# Altium PCB Integrated Preamp PCB.PcbDoc
Units mil, origin at the board's own origin, x right, y up, seen from the top; angles counter-clockwise.
Board outline 2362.2 x 2755.91 mil, 2 copper layers (Top Layer, Bottom Layer), stack 61.8 mil thick; 47 components, 31 nets, 118 pads, 66 vias.
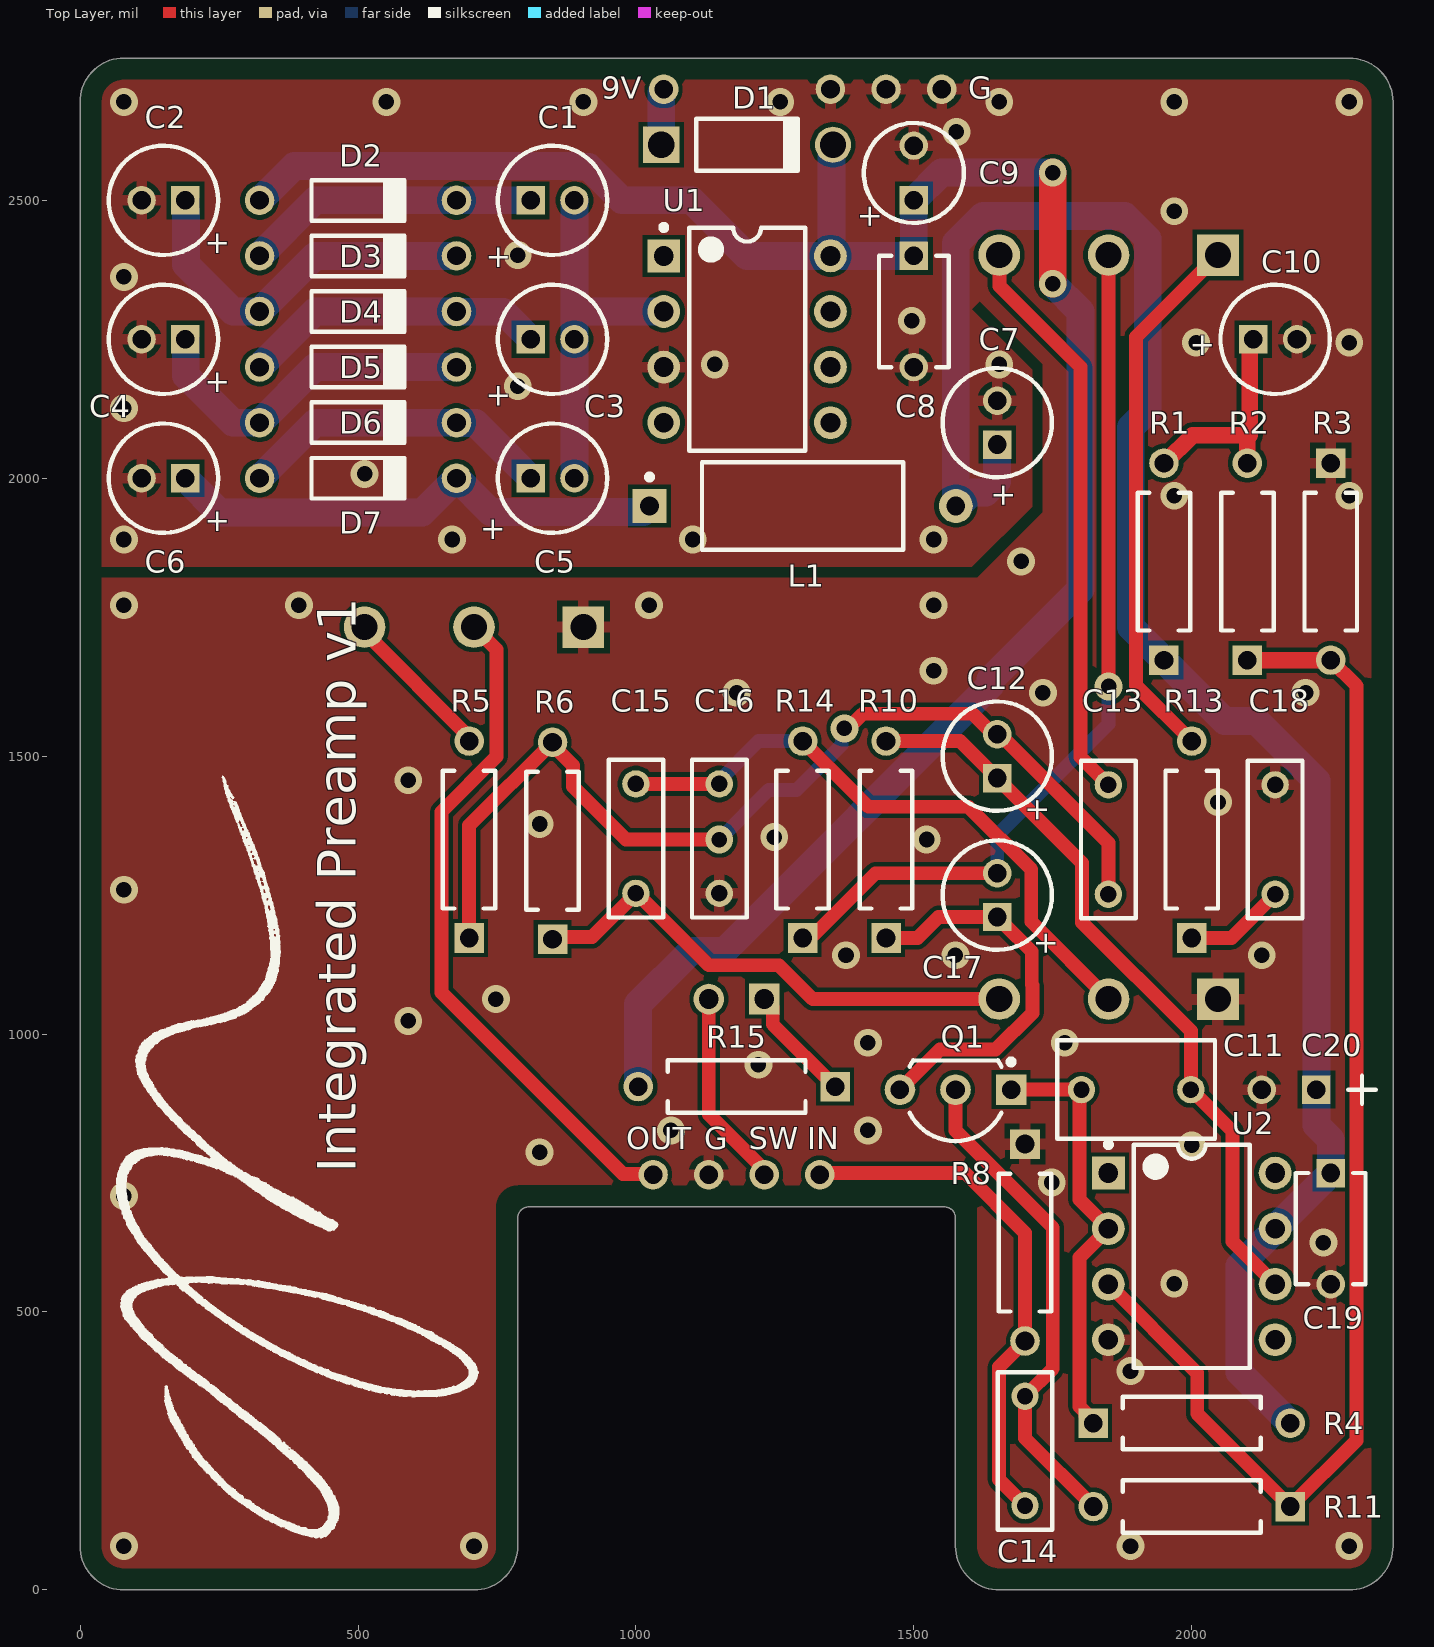
[diagram p0: Top Layer view]
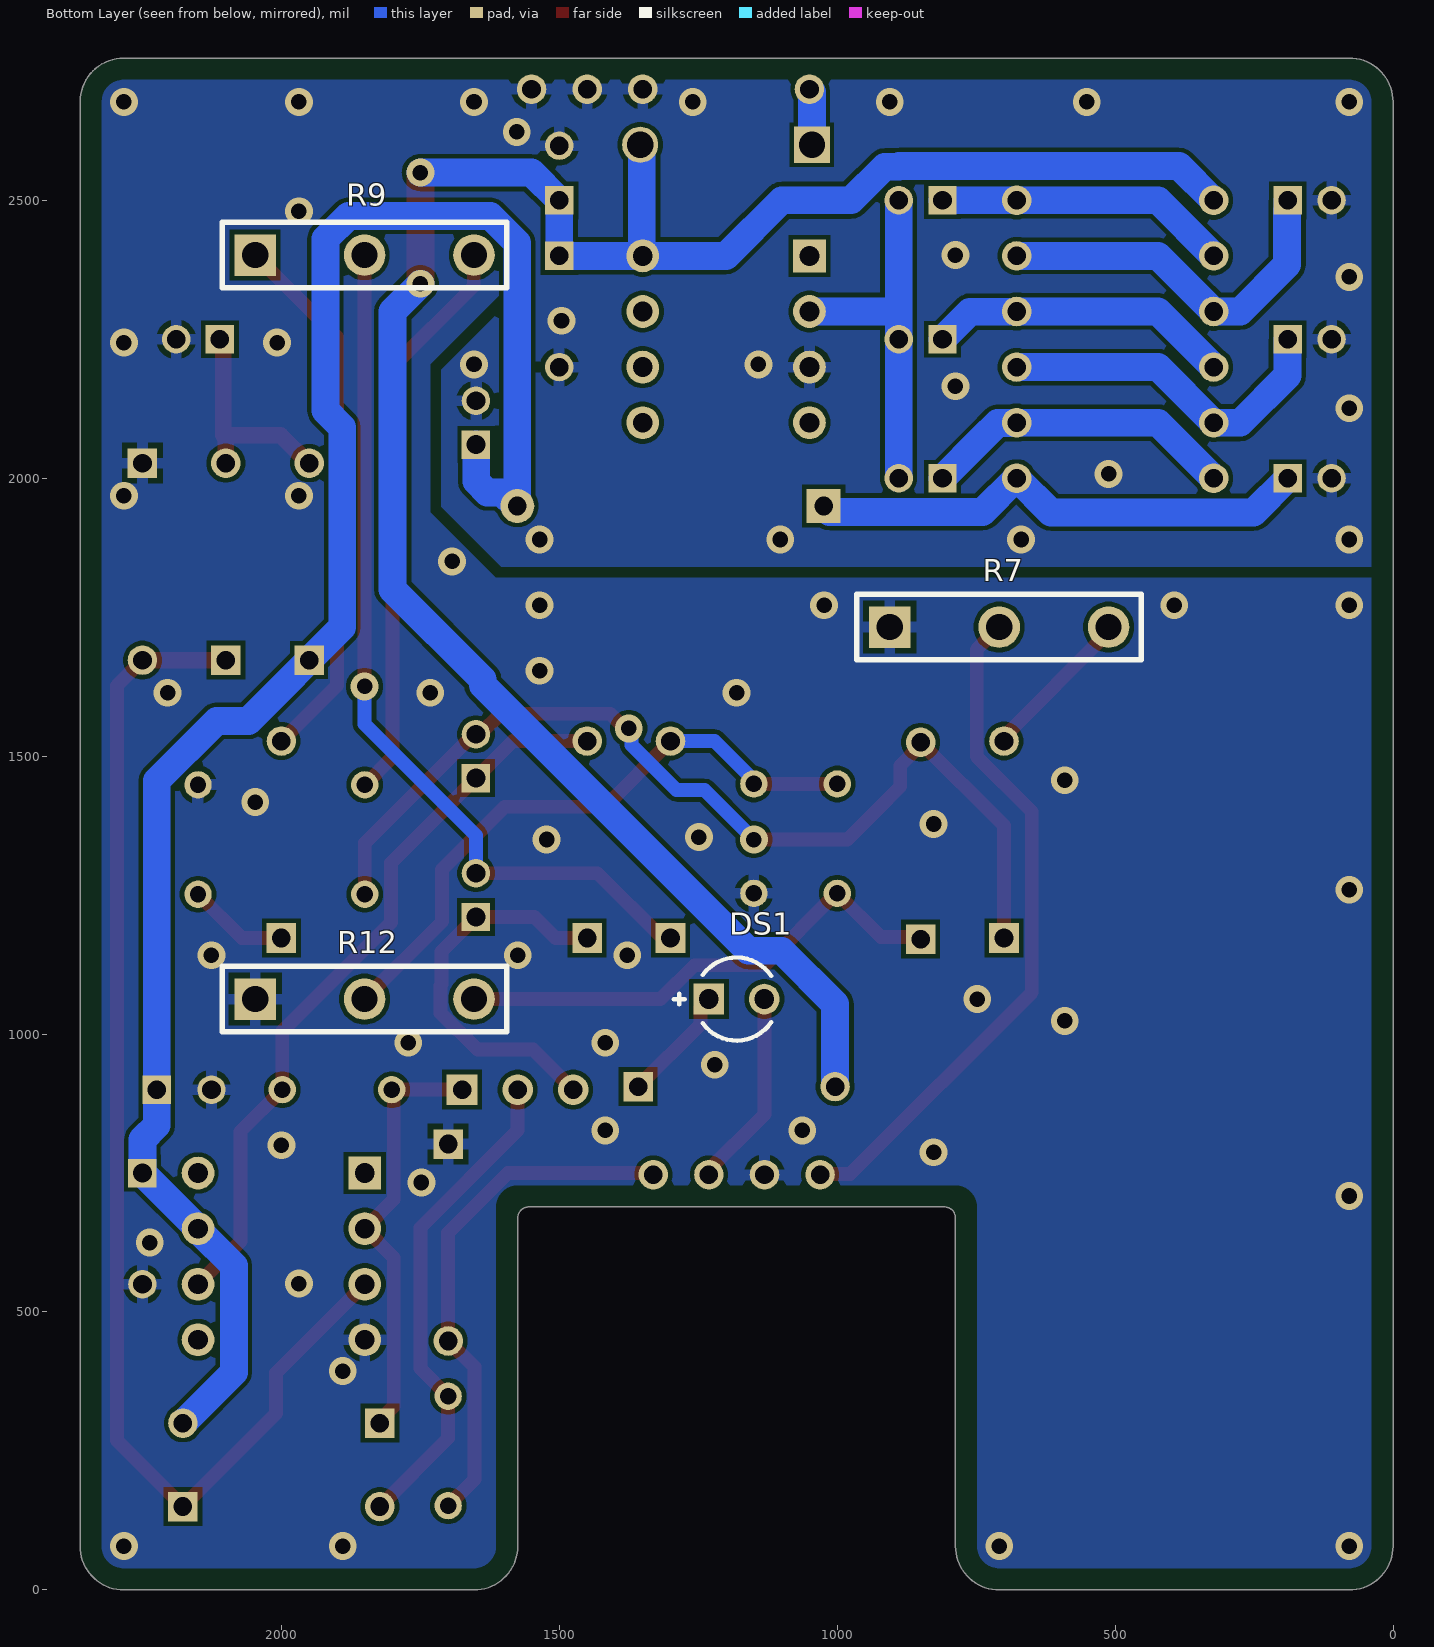
[diagram p1: Bottom Layer view, seen from below]
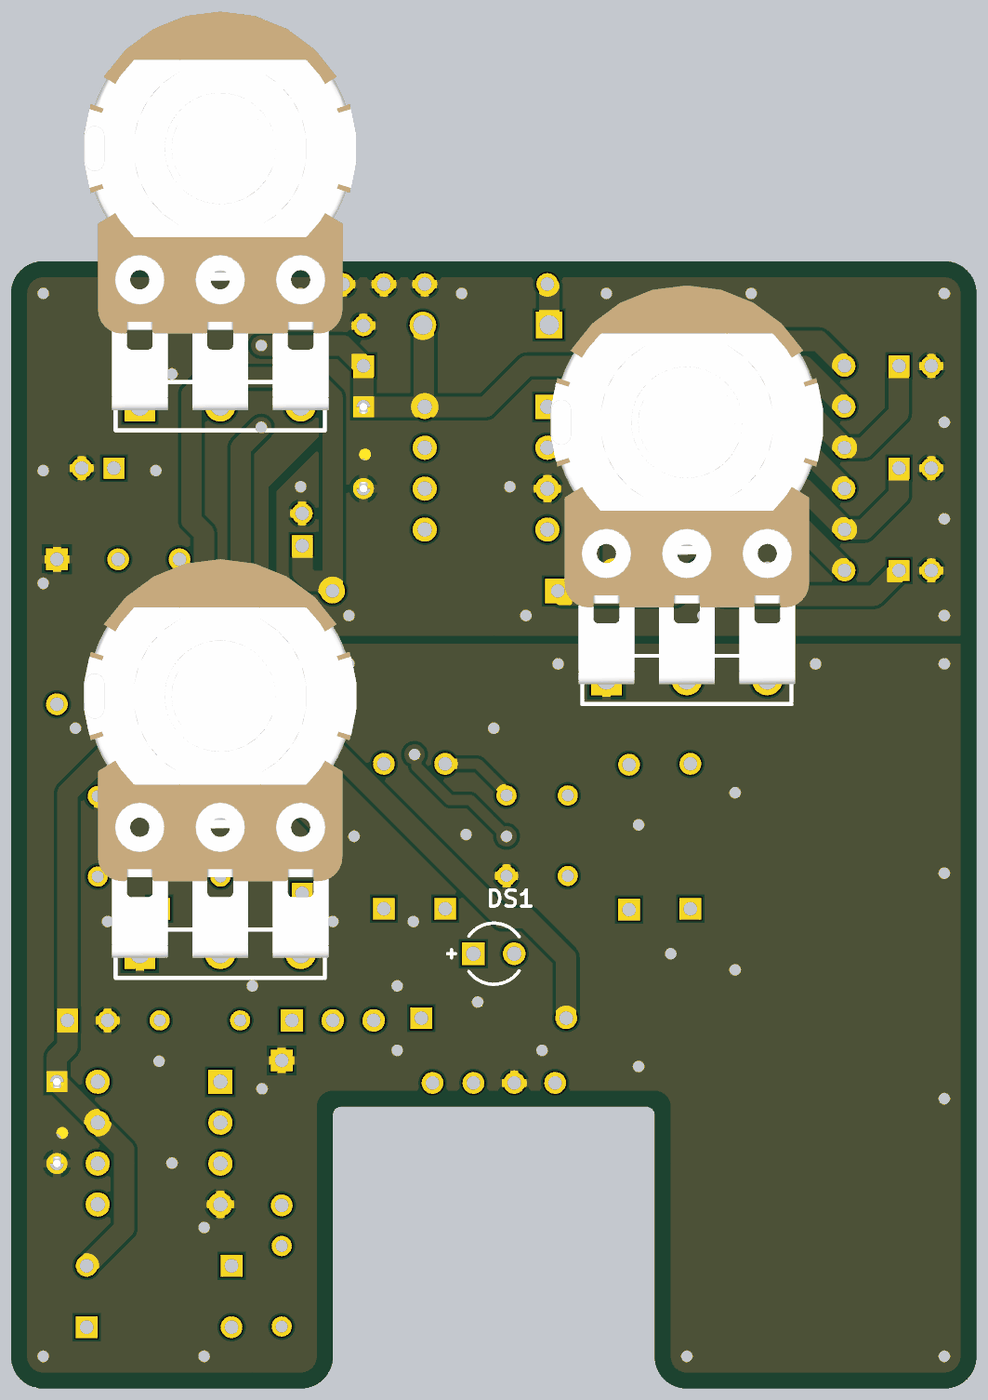
[diagram p2: 3D render of the assembled board from below, using the file's embedded part models]

## Layer stack, top to bottom
Top Solder: solder mask 0.4, Solder Resist, Dk 3.5
Top Layer: signal copper 1.4
Dielectric 1: core 59, FR-4, Dk 4.8
Bottom Layer: signal copper 1.4
Bottom Solder: solder mask 0.4, Solder Resist, Dk 3.5

## Board outline
78.74,0 708.66,0 ccw(c708.66,78.74) 787.4,78.74 787.4,669.29 cw(c807.09,669.29) 807.09,688.98 1555.06,688.98 cw(c1555.06,669.23) 1574.8,669.23 1574.8,78.74 ccw(c1653.54,78.74) 1653.54,0 2283.46,0 ccw(c2283.46,78.74) 2362.2,78.74 2362.2,2677.17 ccw(c2283.46,2677.17) 2283.46,2755.91 78.74,2755.91 ccw(c78.74,2677.17) 0,2677.17 0,78.74 ccw(c78.74,78.74)

## Design rules (kind name [scope] priority, off if disabled: settings)
BoardOutlineClearance [All] p1: gap=7.87 ignorepadtopadclearanceinfootprint=FALSE except(15.75: Arc-SplitBarrior Arc-SplitContinuation Track-SplitBarrior Track-SplitContinuation SMDPad-SplitBarrior SMDPad-SplitContinuation THPad-SplitBarrior THPad-SplitContinuation Via-SplitBarrior Via-SplitContinuation Fill-SplitBarrior Fill-SplitContinuation Poly-SplitBarrior Poly-SplitContinuation Region-SplitBarrior Region-SplitContinuation Text-SplitBarrior Text-SplitContinuation)
Clearance "Clearance Bottom Layer" [OnLayer('Bottom Layer')] p1: gap=8 ignorepadtopadclearanceinfootprint=TRUE except(10: Arc-Text Track-Text SMDPad-Text THPad-Text Via-Text Fill-Text Poly-Text Region-Text Text-Text)
Clearance "Clearance Top Layer" [OnLayer('Top Layer')] p2: gap=8 ignorepadtopadclearanceinfootprint=TRUE except(10: Arc-Text Track-Text SMDPad-Text THPad-Text Via-Text Fill-Text Poly-Text Region-Text Text-Text)
Clearance [All] p3: gap=7.87 ignorepadtopadclearanceinfootprint=FALSE except(3.5: Arc-Arc Arc-Track Arc-SMDPad Track-Track Track-SMDPad SMDPad-SMDPad; 5: Arc-Via Track-Via SMDPad-Via THPad-Via Via-Via; 10: Arc-Text Track-Text SMDPad-Text THPad-Text Via-Text Fill-Text Poly-Text Region-Text Text-Text)
Height [All] p1: minheight=0 maxheight=3937.01 prefheight=500
HoleSize [All] p1: absolutevalues=TRUE maxlimit=248.03 minlimit=7.87 maxpercent=80.000 minpercent=20.000
MinimumAnnularRing [All] p1: minimumring=3
MinimumSolderMaskSliver [All] p1: minsoldermaskwidth=3.94
PolygonConnect PolygonConnect_1 [All] p1: thpad.connectstyle=Relief thpad.reliefconductorwidth=20 thpad.reliefentries=4 thpad.polygonreliefangle="90 Angle" thpad.airgapwidth=10 smdpad.connectstyle=Relief smdpad.reliefconductorwidth=20 smdpad.reliefentries=4 smdpad.polygonreliefangle="90 Angle" smdpad.airgapwidth=10 via.connectstyle=Direct via.reliefconductorwidth=20 via.reliefentries=4 via.polygonreliefangle="90 Angle" via.airgapwidth=10
RoutingCorners [All] p1: cornerstyle=Round minsetback=100 maxsetback=100
RoutingVias [All] p1: holewidth=19.68 width=39.37 viastyle="Through Hole" minholewidth=7.87 minwidth=17.72 maxholewidth=39.37 maxwidth=78.74
SilkToSilkClearance [All] p1: silktosilkclearance=3.94
SilkToSolderMaskClearance [IsPad] p1: minsilkscreentomaskgap=0 clearancetoexposedcopper=TRUE
SolderMaskExpansion [All] p1: expansion=4 istentingtop=FALSE
Width [All] p1: maxlimit=100 minlimit=3.5 preferedwidth=15
24 further rules are at their usual default settings.

## Components (designator, comment, footprint, x,y, rotation, side; value= is the part's Value field where it differs from the comment)
C1 "ECA1HM100" CAPPR55-200-1100X500X1200 850,2500 r0 top value=10µF
C2 "ECA1HM100" CAPPR55-200-1100X500X1200 150,2500 r180 top value=10µF
C3 "ECA1HM100" CAPPR55-200-1100X500X1200 850,2250 r0 top value=10µF
C4 "ECA1HM100" CAPPR55-200-1100X500X1200 150,2250 r180 top value=10µF
C5 "ECA1HM100" CAPPR55-200-1100X500X1200 850,2000 r0 top value=10µF
C6 "ECA1HM100" CAPPR55-200-1100X500X1200 150,2000 r180 top value=10µF
C7 "ECA1HM4R7" CAPPR55-200-1100X500X1200 1650,2100 r90 top value=4.7µF
C8 "0.1µF" FP-C322C104K5R5TA-MFG 1500,2300 r270 top
C9 "10µF" AVX-TAP475K016SCS 1500,2549.21 r90 top
C10 "ECA1HM4R7" CAPPR55-200-1100X500X1200 2150,2250 r0 top value=4.7µF
C11 "MKS2D034701E00KSSD" WIMA-MKS2D034701E00 1900,900 r0 top
C12 "ECA1HM4R7" CAPPR55-200-1100X500X1200 1650,1500 r90 top value=4.7µF
C13 "CMP-2000-06717-1" WIMA-MKS2D024701A00KSSD 1850,1350 r270 top
C14 ".047µF" WIMA-MKS2D024701A00KSSD 1700,250 r90 top
C15 "CMP-2000-06717-1" WIMA-MKS2D024701A00KSSD 1000,1351.57 r90 top
C16 "CMP-2000-06717-1" WIMA-MKS2D024701A00KSSD 1150,1351.57 r90 top
C17 "ECA-1HHG010" CAPPR55-200-1100X500X1200 1650,1250 r90 top value=1µF
C18 "CMP-2000-06717-1" WIMA-MKS2D024701A00KSSD 2150,1350 r270 top
C19 "0.1µF" FP-C322C104K5R5TA-MFG 2250,650 r270 top
C20 "10µF" AVX-TAP475K016SCS 2175,900 r180 top
D1 "1N5817-T" DIOD-DO-41-P-2 1200,2600 r0 top
D2 "1N4148" NXP-SOD27-2_V 500,2500 r0 top
D3 "1N4148" NXP-SOD27-2_V 500,2400 r0 top
D4 "1N4148" NXP-SOD27-2_V 500,2300 r0 top
D5 "1N4148" NXP-SOD27-2_V 500,2200 r0 top
D6 "1N4148" NXP-SOD27-2_V 500,2100 r0 top
D7 "1N4148" NXP-SOD27-2_V 500,2000 r0 top
DS1 "LTL-1CHE" INDPR60-254-520X380X650 1181.1,1062.99 r180 bottom locked
L1 "10mH" EPCS-B78108S-2_V1 1300,1950 r0 top
Q1 "BC548B" ONSC-TO-92-3-29-11 1575,900 r180 top
R1 "MFR-25FBF52-10K" RESA60-630X240 1950,1850 r90 top value=10k
R2 "MFR-25FBF52-100K" RESA60-630X240 2100,1850 r90 top value=100k
R3 "MFR-25FBF52-1M" RESA60-630X240 2250,1850 r270 top value=1M
R4 "MFR-25FBF52-100K" RESA60-630X240 2000,300 r0 top value=100k
R5 "MFR-25FBF52-221R" RESA60-630X240 700,1350 r90 top value=221
R6 "MFR-25FBF52-4K75" RESA60-630X240 850,1347.83 r90 top value=4.75k
R7 "Potentiometer" "PCB MOUNT POTENTIOMETER" 905.51,1732.28 r90 bottom locked value="A 50k"
R8 "MFR-25FBF52-4K75" RESA60-630X240 1700,625 r270 top value=1M
R9 "Treble" "PCB MOUNT POTENTIOMETER" 2047.24,2401.57 r90 bottom locked value="C 50k"
R10 "MFR-25FBF52-221K" RESA60-630X240 1450,1350 r90 top value=221k
R11 "MFR-25FBF52-6.8M" RESA60-630X240 2000,150 r180 top value=6.8M
R12 "Bass" "PCB MOUNT POTENTIOMETER" 2047.24,1062.99 r90 bottom locked value="C 50k"
R13 "MFR-25FBF52-475R" RESA60-630X240 2000,1350 r90 top value=475
R14 "MFR-25FBF52-4K75" RESA60-630X240 1300,1350 r90 top value=8.2k
R15 "MFR-25FBF52-10K" RESA60-630X240 1181.1,905.51 r180 top value=10k
U1 "LT1054CN8#PBF" LT-N8-8 1200,2250 r0 top
U2 "TL071CP" P0008A 2000,600 r0 top

## Footprints (in the part's own frame and the unit in brackets; to place one, negate y for a bottom-side part, rotate by r counter-clockwise, add the part's x,y. Pads: shape width x height; smd on the part's side, far side on the other; paste and mask are expansions set on the pad)
AVX-TAP475K016SCS [mm] "THD, 2-Leads, Dia 4.5mm, Height 7.5mm"
  rect 1.3x1.3 hole 0.85: 1(-1.25,0)
  round 1.3 hole 0.85: 2(1.25,0)
  silkscreen extent -2.29,-2.29 2.29,2.28, body extent -2.25,-2.25 2.25,2.25, height 7.5
CAPPR55-200-1100X500X1200 [mm] "THD, 2-Leads, Dia 5mm, Pin Spacing 2mm"
  rect 1.3x1.3 hole 0.85: 1(-1,0)
  round 1.3 hole 0.85: 2(1,0)
  silkscreen extent -2.5,-2.5 2.5,2.5, body extent -2.5,-2.5 2.45,2.5, height 12
DIOD-DO-41-P-2 [mm] "THD, 2-Leads, Body 4.635x2.36mm, Pin Spacing 7.85mm"
  rect 1.65x1.65 hole 1.2: 1(-3.925,0)
  round 1.65 hole 1.2: 2(3.925,0)
  silkscreen extent -2.32,-1.18 2.32,1.18, body extent -4.36,-1.18 4.36,1.18, height 2.35
EPCS-B78108S-2_V1 [mm] "RF Choke, 2-Leads, Dia 4mm, Length 9.2mm, Pin Spacing 14mm"
  rect 1.55x1.55 hole 0.85: 1(-7,0)
  round 1.55 hole 0.85: 2(7,0)
  silkscreen extent -7.12,-2 4.6,2, body extent -7.4,-1.99 7.4,2, height 3.98
FP-C322C104K5R5TA-MFG [mm]
  rect 1.3x1.3 hole 0.85 paste-1000 mask+0: 1(-2.54,0)
  round 1.3 hole 0.85 paste-1000 mask+0: 2(2.54,0)
  silkscreen extent -2.54,-1.59 2.54,1.59, body extent -3.29,-1.69 3.29,1.69, height 0.25
INDPR60-254-520X380X650 [mm] "THD, 2-Leads, Dia 3.8mm, Pitch 2.54mm"
  rect 1.4x1.4 hole 0.9: 1(-1.27,0)
  round 1.4 hole 0.9: 2(1.27,0)
  silkscreen extent -2.87,-1.9 1.58,1.9, body extent -1.9,-1.9 1.9,1.9, height 6.5
LT-N8-8 [mm] "DIP, 8-Leads, Body 10.15x6.85mm, Pitch 2.54mm"
  rect 1.5x1.5 hole 0.9: 1(-3.81,3.81)
  round 1.5 hole 0.9: 2(-3.81,1.27) 3(-3.81,-1.27) 4(-3.81,-3.81) 5(3.81,-3.81) 6(3.81,-1.27) 7(3.81,1.27) 8(3.81,3.81)
  silkscreen extent -3.93,-5.1 2.65,5.23, body extent -3.95,-5.07 3.95,5.07, height 3.94
NXP-SOD27-2_V [mm] "SOD27, 2-Leads, Dia 1.85mm, Body Length 4.25mm, Pin Spacing 9mm"
  round 1.35 hole 0.85: 1(-4.5,0) 2(4.5,0)
  silkscreen extent -2.12,-0.92 2.12,0.92, body extent -4.78,-0.93 4.78,0.92, height 1.85
ONSC-TO-92-3-29-11 [mm] "TO, 3-Leads, Body Dia 4.7mm, Pitch 1.27mm"
  rect 1.4x1.4 hole 0.85: 1(-2.54,0)
  round 1.4 hole 0.85: 2(0,0) 3(2.54,0)
  silkscreen extent -2.67,-1.39 2.1,2.35, body extent -2.35,-1.33 2.36,2.36, height 7.87
P0008A [mm] "DIP, 8-Leads, Body 10.15x6.6mm, Pitch 2.54mm"
  rect 1.5x1.5 hole 0.9: 1(-3.81,3.81)
  round 1.5 hole 0.9: 2(-3.81,1.27) 3(-3.81,-1.27) 4(-3.81,-3.81) 5(3.81,-3.81) 6(3.81,-1.27) 7(3.81,1.27) 8(3.81,3.81)
  silkscreen extent -3.93,-5.1 2.65,5.23, body extent -3.95,-5.07 3.95,5.07, height 5.08
"PCB MOUNT POTENTIOMETER" [mm]
  rect 1.9x1.9 hole 1.2: 1(0,0)
  round 1.9 hole 1.2: 2(0,-5) 3(0,-10)
  silkscreen extent -1.5,-11.5 1.5,1.5, body extent -0.25,-13.5 24.5,3.5, height 25.9
RESA60-630X240 [mm] "Axial Resistor, 2-Leads, Dia 2.4mm, Body Length 6.3mm"
  rect 1.35x1.35 hole 0.85: 1(-4.5,0)
  round 1.35 hole 0.85: 2(4.5,0)
  silkscreen extent -3.15,-1.2 3.15,1.2, body extent -4.77,-1.19 4.77,1.2, height 2.4
WIMA-MKS2D024701A00KSSD [mm] "THD, 2-Leads, Body 7.2x2.5mm, Pitch 5mm"
  round 1.25 hole 0.75: 1(-2.5,0) 2(2.5,0)
  silkscreen extent -3.6,-1.25 3.6,1.25, body extent -3.6,-1.25 3.6,1.25, height 6.5
WIMA-MKS2D034701E00 [mm] "THD, 2-Leads, Body 7.2x4.5mm, Pitch 5mm"
  round 1.25 hole 0.75: 1(-2.5,0) 2(2.5,0)
  silkscreen extent -3.6,-2.25 3.6,2.25, body extent -3.6,-2.25 3.6,2.25, height 9.5

## Part data
C1 C2 C3 C4 C5 C6: library part CMP-001-00025-7, "Aluminum Electrolytic Capacitor, 10 uF, +/- 20%, 50 V, -40 to 85 degC, 2-Pin THD, RoHS, Bulk", Capacitor Type=Electrolytic, Case/Package=Radial, Manufacturer=Panasonic, Max Operating Temperature=85°C, Min Operating Temperature=-40°C, Package Description="2-Pin Radial Lead, Dia 5 mm, Height 12 mm", Package Quantity=200, Package Reference=CAPPR55-200-1100X500X1200, Ripple Current=65mA, Tolerance=20%, Voltage Rating=50V, Datasheet URL=https://industrial.panasonic.com/cdbs/www-data/pdf/RDF0000/ABA0000C1218.pdf, Datasheet Version="Rev. 05, 10/2016", Diameter=5mm, Lead Pitch=2mm, Manufacturer URL=http://www.panasonic.com/, Mounting Technology=TH, Packaging=Bulk, Pins=2, Ripple Current (AC)=65mA, RoHS Compliant=True
C7 C10 C12: library part CMP-001-00033-7, "Aluminum Electrolytic Capacitor, 4.7 uF, +/- 20%, 50 V, -40 to 85 degC, 2-Pin THD, RoHS, Bulk", Capacitor Type=Electrolytic, Case/Package=Radial, Manufacturer=Panasonic, Max Operating Temperature=85°C, Min Operating Temperature=-40°C, Package Description="2-Pin Radial Lead, Dia 5 mm, Height 12 mm", Package Quantity=200, Package Reference=CAPPR55-200-1100X500X1200, Ripple Current=45mA, Tolerance=20%, Voltage Rating=50V, Datasheet URL=https://industrial.panasonic.com/cdbs/www-data/pdf/RDF0000/ABA0000C1218.pdf, Datasheet Version="Rev. 05, 10/2016", Diameter=5mm, Lead Pitch=2mm, Manufacturer URL=http://www.panasonic.com/, Mounting Technology=TH, Packaging=Bulk, Pins=2, Ripple Current (AC)=45mA, RoHS Compliant=True
C8 C19: library part CMP-03020-034661-1, "CAP CER 0.1UF 50V X7R RADIAL", Capacitance=100nF, Case/Package=Radial, Dielectric=X7R, Dielectric Material=Ceramic, Max Operating Temperature=125°C, Min Operating Temperature=-55°C, Package Quantity=500, Tolerance=10%, Voltage=50V, Construction=RADIAL, Depth=3.18mm, Dissipation Factor=2.5%, Height=3.18mm, Height - Seated (Max)=0.26inch, Lead Diameter=0.51mm, Lead Free="Lead Free", Lead Length=7mm, Lead Pitch=5.08mm, Lead/Base Style="Formed Leads", Length=5.08mm, Material=Ceramic, Mount="Through Hole", Number of Pins=2, Packaging=Bulk, Radiation Hardening=No, REACH SVHC="No SVHC", RoHS Compliant=Yes, Series="Golden Max™", Termination=Radial, Voltage Rating=50V, Voltage Rating (DC)=50V, Weight=0.0625lb, Width=0.125inch
C9 C20: library part CMP-2000-07562-1, "Dipped Radial Capacitor, 4.7 uF, +/- 10%, 16 V, -55 to 125 degC, RoHS, Bulk", Capacitance=4.7uF, Case\/Package=Dipped, Dielectric Material=Tantalum, ESR (Equivalent Series Resistance)=5Ohm, Leakage Current=600nA, Manufacturer=AVX, Max Operating Temperature=125degC, Min Operating Temperature=-55degC, Package Description="2-Pin Through Hole Device, Dia 4.5 mm, Height 7.5 mm", Package Quantity=1000, Package Reference=TAP475K016SCS, Tolerance=10%, Voltage=16V, Datasheet URL=http://datasheets.avx.com/tap.pdf, Datasheet Version=08/2015, Diameter=4.5mm, Dissipation Factor=6%, Height=7.5mm, Height - Seated (Max)=0.295inch, Lead Diameter=0.5mm, Lead Free=LeadFree, Lead Pitch=2.5mm, Length=7.5mm, Life (Hours)=1000Hour, Manufacturer URL=http://www.avx.com/, Mount=PCB, Mounting Technology=ThroughHole, Number of Pins=2, Packaging=Bulk, Polarity=Polar, Radiation Hardening=No, REACH SVHC=NoSVHC, RoHSCompliant=True, Termination=Radial, Voltage Rating=16V, Voltage Rating (DC)=16V
C11: library part CMP-2000-06717-1, "Metallized Polyester (PET) Capacitor, 0.47 uF, +/- 10%, 100 V DC, 63 V AC, -55 to 100 degC, 2-Pin THD, RoHS, Bulk", Capacitance=100pF, Capacitance Tolerance=±10%, Capacitor Case Style=-, Capacitor Dielectric Type=PET(Polyester), Capacitor Terminals=RadialLeaded, Manufacturer=Wima, Operating Temperature Max=100°C, Operating Temperature Min=-55°C, Package Description="2-Pin Through Hole Device, Body 7.2 x 4.5 mm, Pitch 5 mm", Package Reference=MKS2D034701E00, Voltage Rating=100V, Automotive Qualification Standard=-, Datasheet URL=http://www.wima.com/EN/WIMA_MKS_2.pdf, Datasheet Version=04/2016, Lead Spacing=5mm, Manufacturer URL=http://www.wima.com/, Mounting Technology=ThroughHole, Packaging=Each, Product Range=MKS2Series, SVHC=NoSVHC(15-Jun-2015)
C13: "Metallized Polyester (PET) Capacitor, 0.47 uF, +/- 10%, 100 V DC, 63 V AC, -55 to 100 degC, 2-Pin THD, RoHS, Bulk", Capacitance=0.0047µF, Capacitance Tolerance=±10%, Capacitor Case Style=-, Capacitor Dielectric Type=PET(Polyester), Capacitor Terminals=RadialLeaded, Manufacturer=Wima, Operating Temperature Max=100°C, Operating Temperature Min=-55°C, Package Description="2-Pin Through Hole Device, Body 7.2 x 4.5 mm, Pitch 5 mm", Package Reference=MKS2D034701E00, Voltage Rating=100V, Automotive Qualification Standard=-, Datasheet URL=http://www.wima.com/EN/WIMA_MKS_2.pdf, Datasheet Version=04/2016, Lead Spacing=5mm, Manufacturer URL=http://www.wima.com/, Mounting Technology=ThroughHole, Packaging=Each, Product Range=MKS2Series, SVHC=NoSVHC(15-Jun-2015)
C14: library part CMP-2000-06717-1, "Metallized Polyester (PET) Capacitor, 0.47 uF, +/- 10%, 100 V DC, 63 V AC, -55 to 100 degC, 2-Pin THD, RoHS, Bulk", Capacitance=0.47µF, Capacitance Tolerance=±10%, Capacitor Case Style=-, Capacitor Dielectric Type=PET(Polyester), Capacitor Terminals=RadialLeaded, Manufacturer=Wima, Operating Temperature Max=100°C, Operating Temperature Min=-55°C, Package Description="2-Pin Through Hole Device, Body 7.2 x 4.5 mm, Pitch 5 mm", Package Reference=MKS2D034701E00, Voltage Rating=100V, Automotive Qualification Standard=-, Datasheet URL=http://www.wima.com/EN/WIMA_MKS_2.pdf, Datasheet Version=04/2016, Lead Spacing=5mm, Manufacturer URL=http://www.wima.com/, Mounting Technology=ThroughHole, Packaging=Each, Product Range=MKS2Series, SVHC=NoSVHC(15-Jun-2015)
C15: "Metallized Polyester (PET) Capacitor, 0.47 uF, +/- 10%, 100 V DC, 63 V AC, -55 to 100 degC, 2-Pin THD, RoHS, Bulk", Capacitance=0.022µF, Capacitance Tolerance=±10%, Capacitor Case Style=-, Capacitor Dielectric Type=PET(Polyester), Capacitor Terminals=RadialLeaded, Manufacturer=Wima, Operating Temperature Max=100°C, Operating Temperature Min=-55°C, Package Description="2-Pin Through Hole Device, Body 7.2 x 4.5 mm, Pitch 5 mm", Package Reference=MKS2D034701E00, Voltage Rating=100V, Automotive Qualification Standard=-, Datasheet URL=http://www.wima.com/EN/WIMA_MKS_2.pdf, Datasheet Version=04/2016, Lead Spacing=5mm, Manufacturer URL=http://www.wima.com/, Mounting Technology=ThroughHole, Packaging=Each, Product Range=MKS2Series, SVHC=NoSVHC(15-Jun-2015)
C16: "Metallized Polyester (PET) Capacitor, 0.47 uF, +/- 10%, 100 V DC, 63 V AC, -55 to 100 degC, 2-Pin THD, RoHS, Bulk", Capacitance=0.22µF, Capacitance Tolerance=±10%, Capacitor Case Style=-, Capacitor Dielectric Type=PET(Polyester), Capacitor Terminals=RadialLeaded, Manufacturer=Wima, Operating Temperature Max=100°C, Operating Temperature Min=-55°C, Package Description="2-Pin Through Hole Device, Body 7.2 x 4.5 mm, Pitch 5 mm", Package Reference=MKS2D034701E00, Voltage Rating=100V, Automotive Qualification Standard=-, Datasheet URL=http://www.wima.com/EN/WIMA_MKS_2.pdf, Datasheet Version=04/2016, Lead Spacing=5mm, Manufacturer URL=http://www.wima.com/, Mounting Technology=ThroughHole, Packaging=Each, Product Range=MKS2Series, SVHC=NoSVHC(15-Jun-2015)
C17: library part CMP-001-00024-7, "Aluminum Electrolytic Capacitor, 1 uF, +/- 20%, 50 V, -55 to 105 degC, 2-Pin THD, RoHS, Bulk", Capacitor Type=Electrolytic, Case/Package=Radial, Manufacturer=Panasonic, Max Operating Temperature=105°C, Min Operating Temperature=-55°C, Package Description="2-Pin Radial Lead, Dia 5 mm, Height 12 mm", Package Quantity=200, Package Reference=CAPPR55-200-1100X500X1200, Ripple Current=10mA, Tolerance=20%, Voltage Rating=50V, Datasheet URL=https://datasheet.ciiva.com/7275/94060-7275472.pdf, Datasheet Version=Mar-05, Diameter=5mm, Lead Pitch=2mm, Manufacturer URL=http://www.panasonic.com/, Mounting Technology=TH, Packaging=Bulk, Pins=2, Ripple Current (AC)=10mA, RoHS Compliant=True
C18: "Metallized Polyester (PET) Capacitor, 0.47 uF, +/- 10%, 100 V DC, 63 V AC, -55 to 100 degC, 2-Pin THD, RoHS, Bulk", Capacitance=0.047µF, Capacitance Tolerance=±10%, Capacitor Case Style=-, Capacitor Dielectric Type=PET(Polyester), Capacitor Terminals=RadialLeaded, Manufacturer=Wima, Operating Temperature Max=100°C, Operating Temperature Min=-55°C, Package Description="2-Pin Through Hole Device, Body 7.2 x 4.5 mm, Pitch 5 mm", Package Reference=MKS2D034701E00, Voltage Rating=100V, Automotive Qualification Standard=-, Datasheet URL=http://www.wima.com/EN/WIMA_MKS_2.pdf, Datasheet Version=04/2016, Lead Spacing=5mm, Manufacturer URL=http://www.wima.com/, Mounting Technology=ThroughHole, Packaging=Each, Product Range=MKS2Series, SVHC=NoSVHC(15-Jun-2015)
D1: library part CMP-2000-05521-1, "Schottky Barrier Rectifier, 1 A, 20 V, -65 to 125 degC, 2-Pin DO-41, RoHS, Tape and Reel", If - Forward Current=1A, Ifsm - Forward Surge Current=25A, Ir - Reverse Current=1000uA, Manufacturer=DiodesIncorporated, Maximum Operating Temperature=+125C, Minimum Operating Temperature=-65C, Operating Temperature Range=-65Cto+125C, Package / Case=DO-41, Package Description="2-Pin Through Hole Device, Body 4.635 x 2.36 mm, Pin Spacing 7.85 mm", Package Reference=DO-41-P-2, Vf - Forward Voltage=0.75Vat3A, Vrrm - Repetitive Reverse Voltage=20V, Brand=DiodesIncorporated, Configuration=Single, Datasheet URL=http://www.diodes.com/_files/datasheets/ds23001.pdf, Datasheet Version="Rev. 8-2, 05/2009", Factory Pack Quantity=5000, Height=2.72mm, Length=5.21mm, Manufacturer URL=http://www.diodes.com/, Mounting Style=ThroughHole, Mounting Technology=ThroughHole, Packaging=Reel, Product=SchottkyRectifiers, Product Category=SchottkyDiodes&Rectifiers, RoHS=True, Series=1N58, Technology=Si, Termination Style=ThroughHole, Type=SchottkyDiode, Unit Weight=0.010582oz, Width=2.72mm
D2 D3 D4 D5 D6 D7: library part CMP-004-00000-2, "High Speed Diode, 100 V, 0.45 A, -65 to 175 degC, 2-Pin SOD27, RoHS, Bulk", Case/Package=DO, Forward Current=300mA, Forward Voltage=1V, Manufacturer=Fairchild, Max Operating Temperature=175°C, Max Surge Current=4A, Min Operating Temperature=-65°C, Package Quantity=2000, Package Reference=SOD27, Peak Reverse Current=5uA, Power=500mW, Datasheet URL=http://www.nxp.com/documents/data_sheet/1N4148_1N4448.pdf, Datasheet Version=Aug-04, Diameter=1.91mm, Elements=1, Manufacturer URL=https://www.fairchildsemi.com/, Package URL=http://www.nxp.com/documents/data_sheet/1N4148_1N4448.pdf, Packaging=Bulk, Pins=2, Recovery Time=4ns, RoHS Compliant=True
DS1: library part CMP-007-00018-2, "LED Uni-Color Red, 100 mW, 30 mA, -55 to 100 degC, 2-Pin THD, RoHS, Bulk", Case/Package=Radial, Colour=Red, Forward Current=20mA, Forward Voltage=2V, Manufacturer=Lite-On, Max Operating Temperature=100°C, Min Operating Temperature=-55°C, Package Description="2-Pin Through Hole Device, Dia 3.8 mm, Pitch 2.54 mm", Package Quantity=1000, Datasheet URL=https://datasheet.ciiva.com/15117/getdatasheetpartid-187746-15117985.pdf, Datasheet Version=Dec-03, Illumination Colour=Red, Lens Style=Dome, Luminous Intensity=12.6mcd, Manufacturer URL=http://www.us.liteon.com/, Mounting Technology=TH, Nominal Vf=2V, Package Reference=LTL-1CHE, Packaging=Bulk, Pins=2, RoHS Compliant=True, Viewing Angle=60degrees
L1: library part CMP-0816-00001-1, "RF Choke, 470 uH +/- 5%, 170 mA, Dia 4 mm, Length 9.2 mm, Axial Leads, RoHS, Tape and Reel", Manufacturer=EPCOS, PartNumber=B78108S1474J, Tolerance="+/- 5%", ComponentLink1Description="Manufacturer URL", ComponentLink1URL=http://www.epcos.com/, ComponentLink2Description=Datasheet, ComponentLink2URL=http://www.epcos.com/inf/30/db/ind_2008/b78108_148s.pdf, DatasheetVersion=Jun-12, FQ="0.796 MHz", Fres="2.2 MHz Min.", IR="170 mA", LR="470 uH", Mounting Technology="Through Hole", PackageDescription="2-Pin RF Choke, Dia 4 mm, Length 9.2 mm", PackageReference=B78108S-2, Packing="Tape and Reel", Q="70 Min.", R="7.9 Ohm Max.", RoHS=TRUE
Q1: library part CMP-1048-01456-1, "Amplifier Transistor, NPN Silicon, 3-Pin TO-92, Bulk Box", Manufacturer="On Semiconductor", ComponentLink1Description="Manufacturer URL", ComponentLink1URL=http://www.onsemi.com/, ComponentLink2Description=Datasheet, ComponentLink2URL=http://www.onsemi.com/pub_link/Collateral/BC546-D.PDF, ComponentLink3Description="Package Specification", ComponentLink3URL=http://www.onsemi.cn/pub_link/Collateral/2N6426-D.PDF, DatasheetVersion="Rev. 7", fT Min (MHz)=150, IC Continuous (A)=0.1, Mounting Technology="Through Hole", PackageDescription="3-Pin Transistor Outline, Body 4.825 x 3.685 mm, Pitch 1.27 mm", PackageReference=TO-92-3-29-11_AM_SL, PackageVersion="Rev. AM", Packing="Bulk Box", PartNumber=BC548B, Polarity=NPN, RoHS=FALSE
R1 R15: library part CMP-009-00047-4, "Axial Resistor, 10 KOhm, +/- 1%, 0.25 W, -55 to 155 degC, 2-Pin THD, RoHS, Bulk", Case/Package=Axial, Manufacturer=Yageo, Max Operating Temperature=155°C, Min Operating Temperature=-55°C, Package Description="2-Pin Axial Lead, Dia 2.4 mm, Body Length 6.3 mm", Package Quantity=200, Package Reference=MFR-25, Power=250mW, Tolerance=1%, Voltage Rating=250V, Datasheet URL=http://www.yageo.com/documents/recent/Yageo%20LR_MFR_2013.pdf, Datasheet Version=Apr-13, Manufacturer URL=http://www.yageo.com/, Mounting Technology=TH, Packaging=Bulk, RoHS Compliant=True
R2 R4: library part CMP-009-00045-4, "Axial Resistor, 100 KOhm, +/- 1%, 0.25 W, -55 to 155 degC, 2-Pin THD, RoHS, Bulk", Case/Package=Axial, Manufacturer=Yageo, Max Operating Temperature=155°C, Min Operating Temperature=-55°C, Package Description="2-Pin Axial Lead, Dia 2.4 mm, Body Length 6.3 mm", Package Quantity=200, Package Reference=MFR-25, Power=250mW, Tolerance=1%, Voltage Rating=250V, Datasheet URL=http://www.yageo.com/documents/recent/Yageo%20LR_MFR_2013.pdf, Datasheet Version=Apr-13, Manufacturer URL=http://www.yageo.com/, Mounting Technology=TH, Packaging=Bulk, RoHS Compliant=True
R3: library part CMP-009-00049-5, "Axial Resistor, 1 MOhm, +/- 1%, 250 mW, -55 to 155 degC, 2-Pin THD, RoHS, Bulk", Case/Package=Axial, Manufacturer=Yageo, Max Operating Temperature=155°C, Min Operating Temperature=-55°C, Package Description="2-Pin Axial Lead, Dia 2.4 mm, Body Length 6.3 mm", Package Quantity=200, Package Reference=MFR-25, Power=250mW, Tolerance=1%, Voltage Rating=250V, Datasheet URL=http://www.yageo.com/documents/recent/Yageo%20LR_MFR_2013.pdf, Datasheet Version=Apr-13, Manufacturer URL=http://www.yageo.com/, Mounting Technology=TH, Packaging=Bulk, RoHS Compliant=True
R5: library part CMP-009-00051-4, "Axial Resistor, 221 Ohm, +/- 1%, 250 mW, -55 to 155 degC, 2-Pin THD, RoHS, Bulk", Case/Package=Axial, Manufacturer=Yageo, Max Operating Temperature=155°C, Min Operating Temperature=-55°C, Package Description="2-Pin Axial Lead, Dia 2.4 mm, Body Length 6.3 mm", Package Quantity=200, Package Reference=MFR-25, Power=250mW, Tolerance=1%, Voltage Rating=250V, Datasheet URL=http://www.yageo.com/documents/recent/Yageo%20LR_MFR_2013.pdf, Datasheet Version=Apr-13, Manufacturer URL=http://www.yageo.com/, Mounting Technology=TH, Packaging=Bulk, RoHS Compliant=True
R6 R8 R14: library part CMP-009-00059-4, "Axial Resistor, 4.75 KOhm, +/- 1%, 0.25 W, -55 to 155 degC, 2-Pin THD, RoHS, Bulk", Case/Package=Axial, Manufacturer=Yageo, Max Operating Temperature=155°C, Min Operating Temperature=-55°C, Package Description="2-Pin Axial Lead, Dia 2.4 mm, Body Length 6.3 mm", Package Quantity=200, Package Reference=MFR-25, Power=250mW, Tolerance=1%, Voltage Rating=250V, Composition=MetalFilm, Datasheet URL=http://www.yageo.com/documents/recent/Yageo%20LR_MFR_2013.pdf, Datasheet Version=Apr-13, Manufacturer URL=http://www.yageo.com/, Mounting Technology=TH, Packaging=Bulk, RoHS Compliant=True
R9 R12: library part Potentiometer
R10: library part CMP-009-00050-4, "Axial Resistor, 221 KOhm, +/- 1%, 0.25 W, -55 to 155 degC, 2-Pin THD, RoHS, Bulk", Case/Package=Axial, Manufacturer=Yageo, Max Operating Temperature=155°C, Min Operating Temperature=-55°C, Package Description="2-Pin Axial Lead, Dia 2.4 mm, Body Length 6.3 mm", Package Quantity=200, Package Reference=MFR-25, Power=250mW, Tolerance=1%, Voltage Rating=250V, Datasheet URL=http://www.yageo.com/documents/recent/Yageo%20LR_MFR_2013.pdf, Datasheet Version=Apr-13, Manufacturer URL=http://www.yageo.com/, Mounting Technology=TH, Packaging=Bulk, RoHS Compliant=True
R11: library part CMP-009-00049-5, "Axial Resistor, 6.8 MOhm, +/- 1%, 250 mW, -55 to 155 degC, 2-Pin THD, RoHS, Bulk", Case/Package=Axial, Manufacturer=Yageo, Max Operating Temperature=155°C, Min Operating Temperature=-55°C, Package Description="2-Pin Axial Lead, Dia 2.4 mm, Body Length 6.3 mm", Package Quantity=200, Package Reference=MFR-25, Power=250mW, Tolerance=1%, Voltage Rating=250V, Datasheet URL=http://www.yageo.com/documents/recent/Yageo%20LR_MFR_2013.pdf, Datasheet Version=Apr-13, Manufacturer URL=http://www.yageo.com/, Mounting Technology=TH, Packaging=Bulk, RoHS Compliant=True
R13: library part CMP-009-00056-4, "Axial Resistor, 475 Ohm, +/- 1%, 0.25 W, -55 to 155 degC, 2-Pin THD, RoHS, Bulk", Case/Package=Axial, Manufacturer=Yageo, Max Operating Temperature=155°C, Min Operating Temperature=-55°C, Package Description="2-Pin Axial Lead, Dia 2.4 mm, Body Length 6.3 mm", Package Quantity=200, Package Reference=MFR-25, Power=250mW, Tolerance=1%, Voltage Rating=250V, Datasheet URL=http://www.yageo.com/documents/recent/Yageo%20LR_MFR_2013.pdf, Datasheet Version=Apr-13, Manufacturer URL=http://www.yageo.com/, Mounting Technology=TH, Packaging=Bulk, RoHS Compliant=True
U1: library part CMP-0475-00280-1, "Switched-Capacitor Voltage Converter with Regulator, 3.5 to 15 V Vin, Adjustable Vout, 8-pin DIP (N8-8), 0 to 100 degC, Pb-Free", Frequency(kHz)=25, Manufacturer="Linear Technology", ComponentLink1Description="Manufacturer URL", ComponentLink1URL=http://www.linear.com/, ComponentLink2Description=Datasheet, ComponentLink2URL=http://cds.linear.com/docs/en/datasheet/1054lfg.pdf, ComponentLink3Description="Package Specification", ComponentLink3URL=http://www.linear.com/docs/en/packaging/05081510_I_N8.pdf, DatasheetVersion="Rev. G", Ishutdown(uA)=100, Isupply(mA)=2.5, Max Iout(mA)=100, Mounting Technology="Through Hole", PackageDescription="8-Pin PDIP, Body 10.16 x 6.48 mm, Pitch 2.54 mm", PackageReference=N8-8, PackageVersion="Rev. I, 07/2011", PartNumber=LT1054CN8#PBF, RoHS=TRUE, Vin Max(V)=15, Vin Min(V)=3.5, Voutput=Adj
U2: library part CMP-0017-00972-2, "Low-Noise JFET-Input General-Purpose Operational Amplifier, 7 to 36 V, 0 to 70 degC, 8-pin DIP (P8), Pb-Free (RoHS)", Manufacturer="Texas Instruments", Rating=Military, Total Supply Voltage(Max)(+5V is 5, +/-5V is 10)=36, Total Supply Voltage(Min)(+5V is 5, +/-5V is 10)=7, CMRR(Min)(dB)=70, Code_JEDEC=MS-001, ComponentLink1Description="Manufacturer URL", ComponentLink1URL=http://www.ti.com/, ComponentLink2Description=Datasheet, ComponentLink2URL=http://www.ti.com/lit/ds/symlink/tl071.pdf, ComponentLink3Description="Package Specification", ComponentLink3URL=http://www.ti.com/litv/pdf/mpdi001b, DatasheetVersion=SLOS080J, Eco-Plan="Pb-Free (RoHS)", GBW(Typ)(MHz)=3, IIB(Max)(pA)=200, Iq per channel(Max)(mA)=2.5, Mounting Technology="Through Hole", Number of Channels=1, Offset Drift(Typ)(uV/C)=18, PackageDescription="8-Pin Plastic In-Line, Body 9.59 x 6.35 mm, Pitch 2.54 mm", PackageReference=P0008A, PackageVersion="4040082/E, 04/2010", PartNumber=TL071CP, Slew Rate(Typ)(V/us)=13, Sub Family="General Purpose Amplifier, High Supply Voltage Amplifier (>=30V)", Vio (25C)(Max)(mV)=10, Vn at 1kHz(Typ)(nV/rtHz)=18

## Free pads (board coordinates)
  round 53.15 hole 33.46: 6(1050,2700) 7(1330.91,747.05) 8(1230.91,747.05) 9(1130.91,747.05) 10(1030.91,747.05) 11(1350,2700) 11(1450,2700) 11(1550,2700)

## Via types
v1: diameter 50, hole 28, Top Layer to Bottom Layer, tented both sides, 66 vias

## Nets (pads, with @x,y where several pads share a name; then routed paths per layer and width w, separated by ;. In a path a pad name is that pad's centre, name@x,y a point inside that pad or via, vN(x,y) a via of type N, cw(c..) or ccw(c..) an arc to the next point about the centre after c; other vN are vias at no path point)
9V_IN: D1.1 pad.6 | length 101.9
  Bottom Layer w50: D1.1 1045.47,2694.62 1050,2699.15 pad.6
BIAS: R2.1 R3.2 R11.1 U2.3 | length 2276.7
  Top Layer w25: U2.3 2009.8,390.2 2009.8,317.36 R11.1 2296.09,268.93 2296.09,1626.74 R3.2
  Top Layer w30: R2.1 R3.2
CKT_IN: C14.1 pad.7 R8.2 | length 936.7
  Top Layer w25: pad.7@1338.58,748.03 1340.55,750 1592.52,750 1700,642.52 R8.2 1652.89,400.73 1652.89,198.68 C14.1
CKT_OUT: pad.10 R7.2 | length 1239.1
  Top Layer w25: R7.2 749.07,1691.87 749.07,1499.07 650,1400 650,1075 976.97,748.03 pad.10@1038.58,748.03
GND: C2.2 C4.2 C6.2 C7.2 C8.2 C9.2 C10.2 C16.1 C18.1 C19.2 C20.2 pad.9 pad.11 R3.1 R7.1 R8.1 R12.1 U1.3 U2.4
  other v1: 78.74,78.74 708.66,78.74 1889.76,78.74 2283.46,78.74 1889.76,393.7 1968.5,551.18 2236.93,624.81 78.74,708.66 1748.08,732.95 826.77,787.4 2000,800 1062.99,826.77 1417.32,826.77 1220.47,944.88 1417.32,984.25 1771.65,984.25 590.55,1023.62 748.03,1062.99 1377.95,1141.73 1574.8,1141.73 2125.98,1141.73 78.74,1259.84 1522.95,1350.05 1248.83,1354.35 826.77,1377.95 2047.24,1417.32 590.55,1456.69 1181.1,1614.17 1732.28,1614.17 2204.72,1614.17 1535.43,1653.54 78.74,1771.65 393.7,1771.65 1023.62,1771.65 1535.43,1771.65 1692.91,1850.39 78.74,1889.76 669.29,1889.76 1102.36,1889.76 1535.43,1889.76 1968.5,1968.5 2283.46,1968.5 511.81,2007.87 78.74,2125.98 787.4,2165.35 1141.73,2204.72 1653.54,2204.72 2007.87,2244.09 2283.46,2244.09 1496.06,2283.46 78.74,2362.2 787.4,2401.57 1968.5,2480.32 1576.67,2623.17 78.74,2677.17 551.18,2677.17 905.51,2677.17 1259.84,2677.17 1653.54,2677.17 1968.5,2677.17 2283.46,2677.17
IN: 
NetC1_1: C1.1 D2.2 D3.1 | length 529.2
  Bottom Layer w50: D3.1 422.83,2500 D2.2 C1.1
NetC1_2: C1.2 C3.2 C5.2 U1.2 | length 663.1
  Bottom Layer w50: C5.2 C3.2 889.37,2300 ; C1.2 889.37,2300 ; U1.2@1048.27,2301.73 U1.2 889.37,2300
NetC2_1: C2.1 D3.2 D4.1 | length 678.2
  Bottom Layer w50: C2.1@189.96,2499.41 189.96,2483.58 190.69,2482.85 190.69,2384.31 275,2300 D4.1 422.83,2400 D3.2
NetC3_1: C3.1 D4.2 D5.1 | length 549.9
  Bottom Layer w50: D5.1 422.83,2300 D4.2 677.77,2299.4 761.23,2299.4 C3.1
NetC4_1: C4.1 D5.2 D6.1 | length 629.1
  Bottom Layer w50: C4.1 189.96,2249.41 189.96,2185.04 275,2100 D6.1 422.83,2200 D5.2
NetC5_1: C5.1 D6.2 D7.1 | length 570.6
  Bottom Layer w50: D7.1 422.83,2100 D6.2 677.77,2099.4 711.23,2099.4 739.33,2071.3 C5.1
NetC6_1: C6.1 D7.2 L1.1 | length 914.7
  Bottom Layer w50: C6.1 250.94,1938.43 615.59,1938.43 D7.2 ; D7.2@678.02,2000 738.61,1939.41 1013.82,1939.41 L1.1
NetC10_1: C10.1 R1.2 R2.2 | length 396.1
  Top Layer w30: R1.2 1951.22,2027.17 2001.22,2077.17 2100,2077.17 R2.2 ; 2104.43,2077.17 2104.43,2243.8 C10.1
NetC11_1: C11.1 Q1.1 R4.1 U2.2 | length 781.5
  Top Layer w25: Q1.1 C11.1 1797.97,896.4 1797.97,702.03 U2.2 1797.97,597.97 1797.97,329.97 1808.76,319.18 1808.76,314.07 R4.1
NetC11_2: C11.2 C12.1 R10.2 U2.6 | length 1345.3
  Top Layer w25: R10.2 1583.46,1527.17 1802.89,1307.74 1802.89,1200.72 1998.43,1005.19 C11.2 2073.27,825.15 2073.27,626.73 U2.6
NetC12_2: C12.2 C13.2 R5.1 R6.2 | length 1808.8
  Top Layer w25: R5.1 700,1375 R6.2 850,1520 886.66,1483.34 886.66,1445.15 930.49,1401.32 981.81,1350 v1(1150,1350) ; v1(1375,1550) 1381.76,1550 1408.01,1576.24 1606.05,1576.24 1640.78,1541.5 1652.13,1541.5 1850,1343.63 C13.2
  Bottom Layer w25: v1(1150,1350) 1238.88,1438.88 1288.88,1438.88 1370.22,1520.22 1370.22,1545.22 v1(1375,1550)
NetC13_1: C13.1 R9.3 | length 1034.5
  Top Layer w25: R9.3 1653.95,2401.17 1653.95,2346.05 1800,2200 1800,1498.43 C13.1
NetC14_2: C14.2 Q1.2 R11.2 | length 894.1
  Top Layer w25: Q1.2 1575,826.57 1750,651.57 1750,398.43 C14.2 1700,272.83 R11.2
NetC15_1: C15.1 R6.1 R12.3 | length 916.5
  Top Layer w25: R6.1 853.76,1174.43 921.28,1174.43 C15.1 1001.85,1253.15 1131.24,1123.76 1257.27,1123.76 1318.04,1062.99 R12.3
NetC15_2: C15.2 C16.2 R12.2 R14.2 | length 1133.5
  Top Layer w25: C15.2 C16.2 ; R14.2 1418.24,1408.93 1598.45,1408.93 1711.31,1296.07 1711.31,1202.08 R12.2
  Bottom Layer w25: C16.2 1150,1456.55 1220.61,1527.17 R14.2
NetC17_1: C17.1 Q1.3 R10.1 | length 710.1
  Top Layer w25: R10.1 1506.59,1172.83 1544.39,1210.63 C17.1 1663.09,1197.54 1712.12,1148.51 1712.12,1089.12 1713.44,1087.8 1713.44,1038.18 1647.24,971.97 1546.97,971.97 Q1.3
NetC17_2: C17.2 R9.2 R14.1 | length 1593.5
  Top Layer w25: R14.1 1314.55,1172.83 1431.09,1289.37 C17.2 ; v1(1850.39,1625.39) R9.2
  Bottom Layer w25: C17.2 1650,1357.34 1850.39,1557.74 v1(1850.39,1625.39)
NetC18_2: C18.2 R13.1 | length 182.6
  Top Layer w25: R13.1 2071.26,1172.83 C18.2
NetDS1_1: DS1.1 R15.1 | length 210.2
  Top Layer w25: DS1.1 1246.16,1047.93 1246.16,1017.62 R15.1
NetDS1_2: DS1.2 pad.8 | length 359.5
  Top Layer w25: DS1.2 1131.1,855.51 pad.8@1238.58,748.03
NetR5_2: R5.2 R7.3 | length 283.1
  Top Layer w25: R7.3 511.81,1722.97 700,1534.78 R5.2
NetR9_1: R9.1 R13.2 | length 976.8
  Top Layer w25: R13.2 1900,1627.17 1900,2254.33 R9.1
OUT: 
P9V: C8.1 C9.1 D1.2 D2.1 R15.2 U1.8 | length 3872.2
  Top Layer w50: v1(1750,2350) v1(1750,2550)
  Bottom Layer w50: D2.1 323.69,2500 385.26,2561.57 888.43,2561.57 889.41,2560.59 914.47,2560.59 975.06,2500 1100,2500 1200,2400 U1.8 ; R15.2 1003.94,1053.94 1100,1150 1159.91,1150 1637.75,1627.84 1637.75,1637.75 1800,1800 1800,2300 v1(1750,2350) ; D1.2 1351.73,2597.2 1351.73,2401.73 U1.8 ; v1(1750,2550) 1550,2550 C9.1 C8.1 U1.8
P30V: C7.1 C19.1 C20.1 L1.2 R1.1 R4.2 U2.7 | length 3447
  Bottom Layer w50: C7.1 1649.41,2060.04 1649.41,1994.48 1629.51,1974.58 1603.16,1974.58 1578.57,1950 L1.2 1575.59,2423.18 1624.38,2471.98 1879.55,2471.98 1920.8,2430.74 1920.8,2121.76 1890.43,2091.39 1890.43,1732.41 2059.36,1563.47 2116.42,1563.47 2224.21,1455.68 2224.21,835.94 2250,810.15 C19.1 U2.7 2150,647.55 2085.47,583.02 2085.47,391.69 R4.2 R4.2@2177.17,300.85
pads on no net: U1.1 U1.4 U1.5 U1.6 U1.7 U2.1 U2.5 U2.8

## Polygon pours and split planes (outlines as drawn)
GND on Bottom Layer "GND_L02_P000" (solid, remove dead copper, pour order 0): 39.37,1820.87 1614.17,1820.87 1732.28,1938.98 1732.28,2204.72 1604.33,2332.68 1604.33,2303.15 1712.6,2194.88 1712.6,1948.82 1604.33,1840.55 39.37,1840.55 39.37,2677.17 cw(c78.74,2677.17) 78.74,2716.54 2283.46,2716.54 cw(c2283.47,2677.17) 2322.83,2677.17 2322.83,78.74 cw(c2283.47,78.74) 2283.46,39.37 1653.54,39.37 cw(c1653.54,78.74) 1614.17,78.74 1614.17,688.98 ccw(c1574.8,688.98) 1574.8,728.35 787.4,728.35 ccw(c787.4,688.98) 748.03,688.98 748.03,78.74 cw(c708.66,78.74) 708.66,39.37 78.74,39.37 cw(c78.74,78.74) 39.37,78.74
GND on Top Layer "GND_L01_P002" (solid, remove dead copper, pour order 2): 1618.57,2318.44 1732.28,2204.72 1732.28,1938.98 1614.17,1820.87 39.37,1820.87 39.37,78.74 ccw(c78.74,78.74) 78.74,39.37 708.66,39.37 ccw(c708.66,78.74) 748.03,78.74 748.03,688.98 cw(c787.4,688.98) 787.4,728.35 1574.8,728.35 cw(c1574.8,688.98) 1614.17,688.98 1614.17,78.74 ccw(c1653.54,78.74) 1653.54,39.37 2283.46,39.37 ccw(c2283.47,78.74) 2322.83,78.74 2322.83,2677.17 ccw(c2283.47,2677.17) 2283.46,2716.54 78.74,2716.53 ccw(c78.74,2677.17) 39.37,2677.17 39.37,1840.55 1604.33,1840.55 1712.6,1948.82 1712.6,2194.88 1603.81,2303.67 1611.23,2311.1

## Silkscreen, mask and mechanical layers (free items; w line width, h text height)
Top Overlay:
  drawing of 9 lines, arcs and shapes, not listed
  text "9V" at 938,2683 h40
  text "G" at 1597.87,2682.87 h40
  text "OUT" at 982.87,792.87 h40
  text "G" at 1122.87,792.87 h40
  text "SW" at 1202.87,792.87 h40
  text "IN" at 1307.87,792.87 h40
  text "Integrated Preamp v1" at 518.59,750.11 h118.11 r90
Board Outline:
  the board outline again, w10
Enclosure Drill Template:
  circle w3.94: c1181.1,334.65 r236.22
  circle w3.94: c1181.1,1062.99 r137.8
  lines w3.94: 1102.36,334.65 1181.1,334.65 ; 1102.36,1062.99 1259.84,1062.99 ; 1181.1,255.91 1181.1,334.65 ; 1181.1,413.39 1181.1,334.65 ; 1181.1,984.25 1181.1,1141.73 ; 1259.84,334.65 1181.1,334.65 ; -98.43,-885.83 2460.63,-885.83 2460.63,3838.58 -98.43,3838.58 -98.43,0 -98.43,-885.83

## Text inside footprints (layer, text, board x,y; h text height)
C1: Top Overlay "+" at 730,2380 h40
C2: Top Overlay "+" at 270,2440 h40 r180
C3: Top Overlay "+" at 730,2130 h40
C4: Top Overlay "+" at 270,2190 h40 r180
C5: Top Overlay "+" at 720,1890 h40
C6: Top Overlay "+" at 270,1940 h40 r180
C7: Top Overlay "+" at 1679.02,1946.14 h40 r90
C9: Top Overlay "+" at 1438.79,2447.87 h40 r90
C10: Top Overlay "+" at 1996.14,2220.98 h40
C12: Top Overlay "+" at 1740,1380 h40 r90
C17: Top Overlay "+" at 1755,1140 h40 r90